# Altium PCB main.PcbDoc
Units mm, origin at the board's own origin, x right, y up, seen from the top; angles counter-clockwise.
Board outline 45 x 75 mm, 4 copper layers (Top copper, Inner copper 1, Inner copper 2, Bottom copper), stack 1.618 mm thick; 12 components, 0 nets, 58 pads, 0 vias.
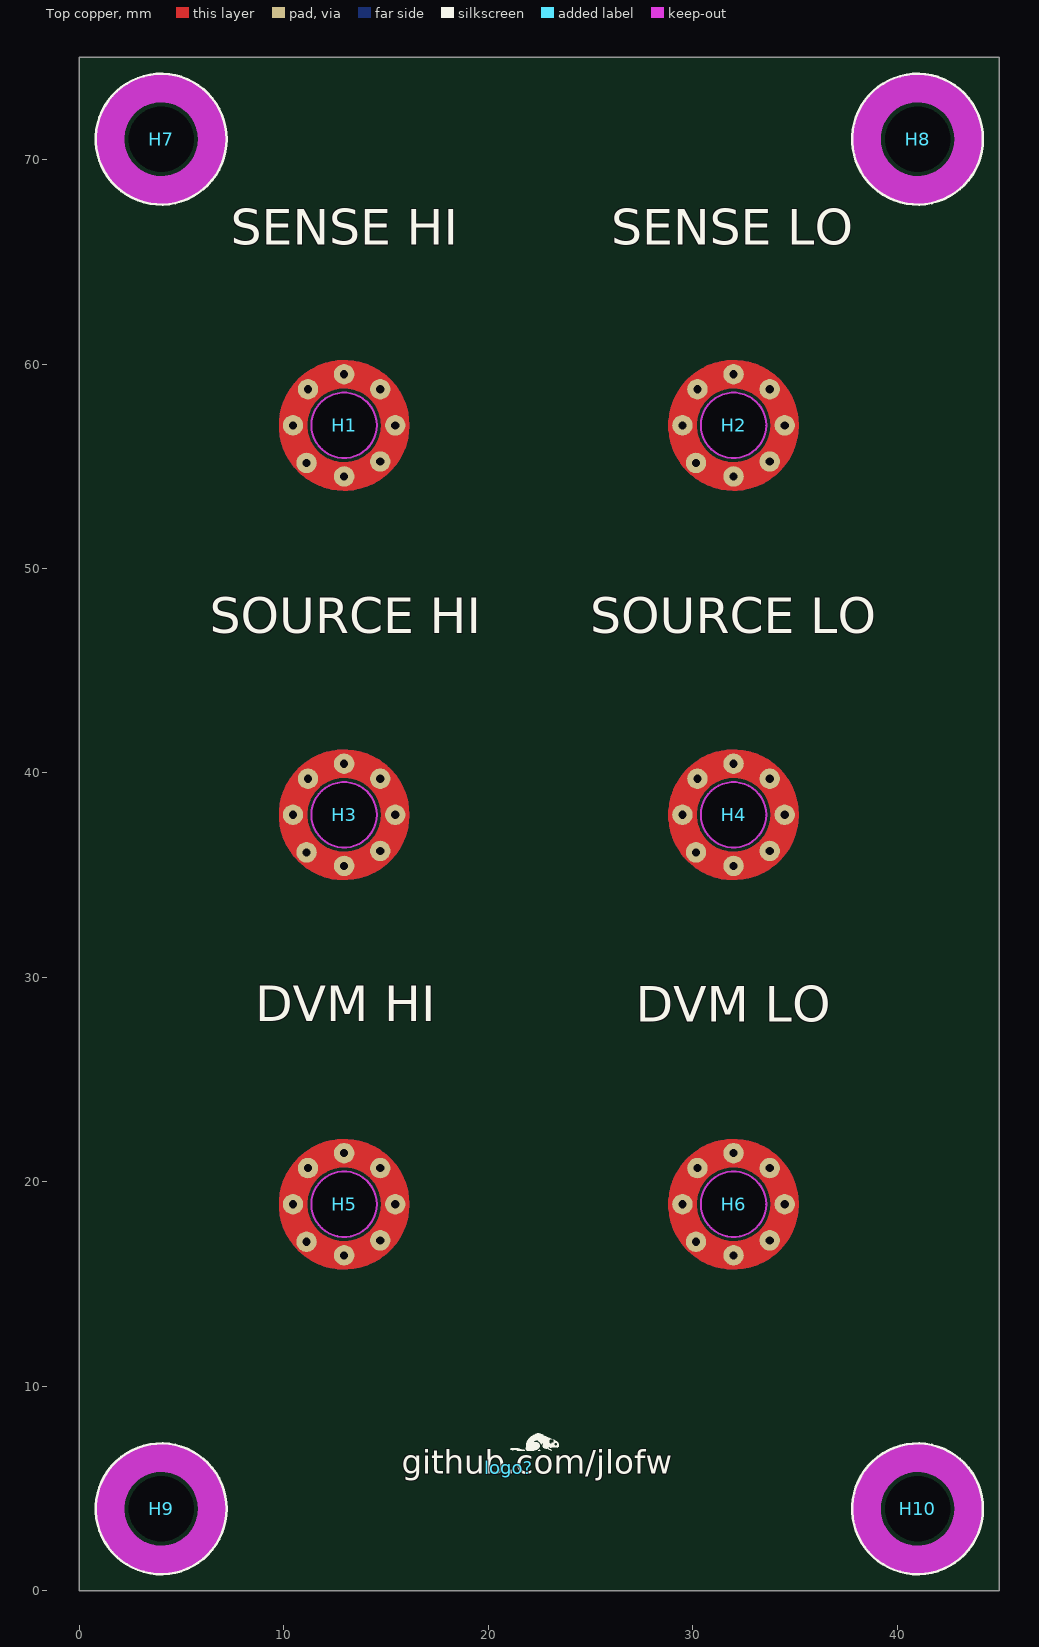
[diagram p0: Top copper view]
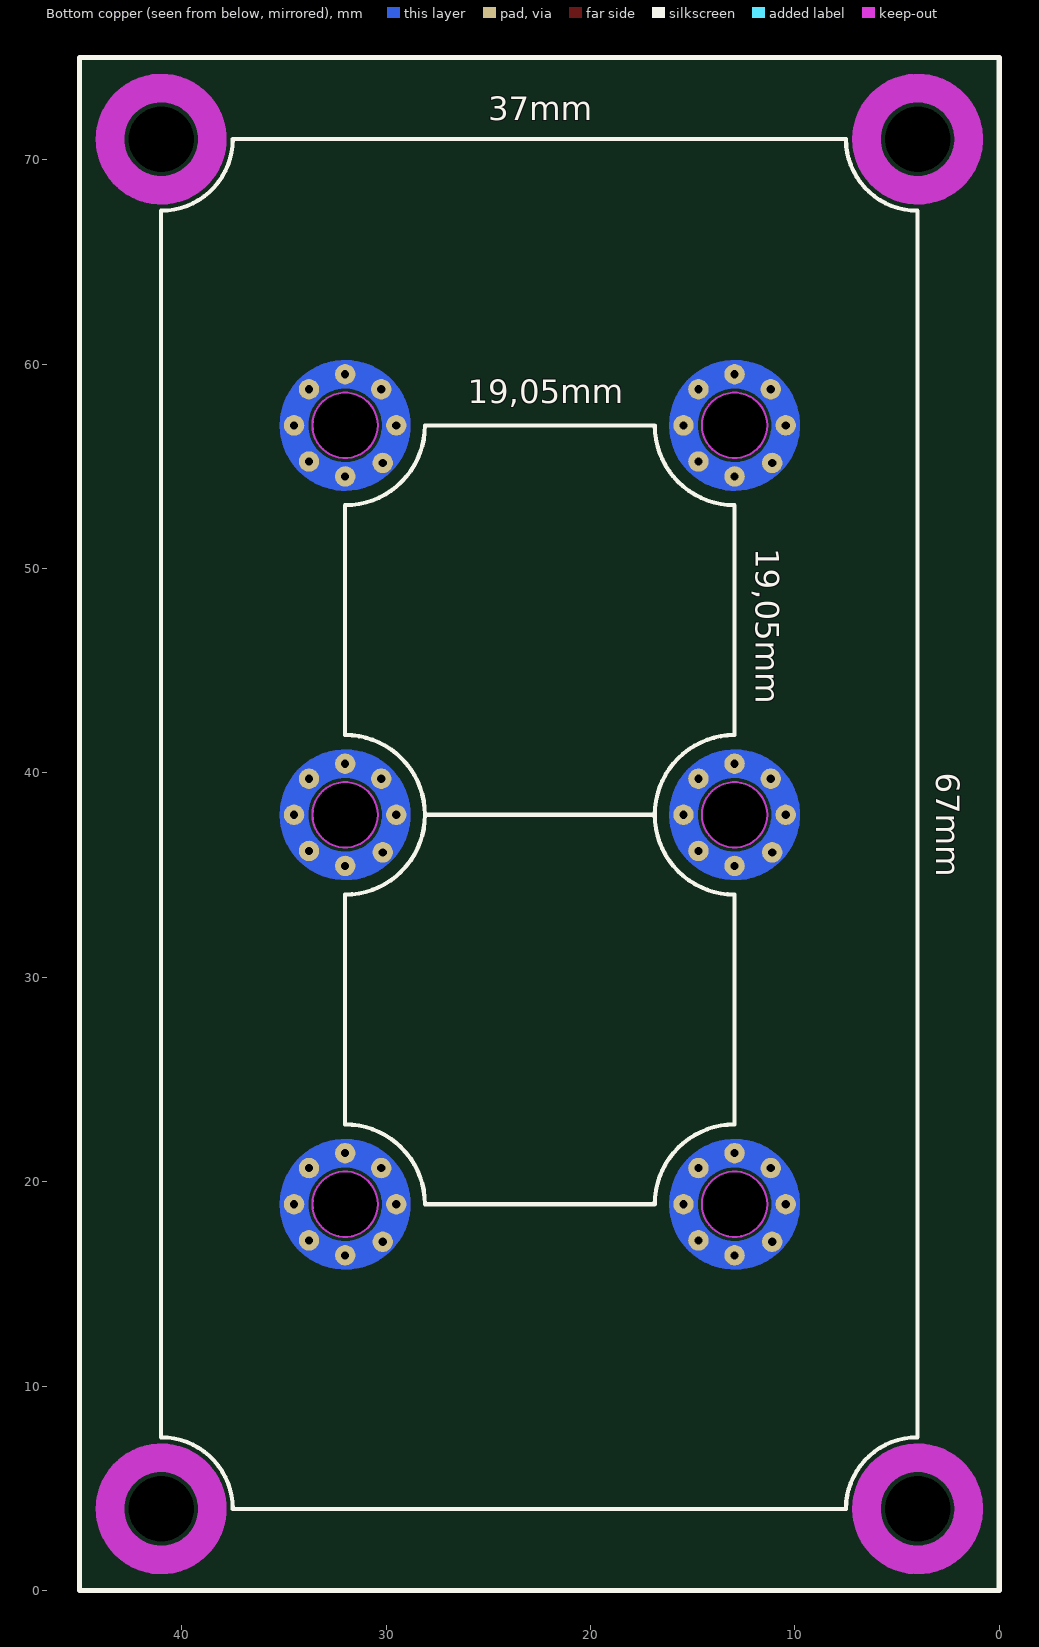
[diagram p1: Bottom copper view, seen from below]

## Layer stack, top to bottom
Top Solder: solder mask 0.0102, Solder Resist, Dk 3.5
Top copper: signal copper 0.018
Dielectric 4: prepreg 0.078, PP-006, Dk 3.9
Dielectric 2: prepreg 0.078, PP-006, Dk 3.9
Inner copper 1: signal copper 0.035
Dielectric 1: dielectric 1.2, FR-4, Dk 4.4
Inner copper 2: signal copper 0.035
Dielectric 3: prepreg 0.078, PP-006, Dk 3.9
Dielectric 5: prepreg 0.078, PP-006, Dk 3.9
Bottom copper: signal copper 0.018
Bottom Solder: solder mask 0.0102, Solder Resist, Dk 3.5

## Board outline
0,0 0,75 45,75 45,0

## Design rules (kind name [scope] priority, off if disabled: settings)
BoardOutlineClearance [All] p1: gap=0.254 ignorepadtopadclearanceinfootprint=FALSE except(0: Arc-SplitContinuation Track-SplitContinuation SMDPad-SplitContinuation THPad-SplitContinuation Via-SplitContinuation Fill-SplitContinuation Poly-SplitContinuation Region-SplitContinuation Text-SplitContinuation)
Clearance [All] p1: gap=0.2 ignorepadtopadclearanceinfootprint=TRUE except(0.1: Arc-Arc)
DiffPairsRouting [All] p1: maxlimit=0.254 minlimit=0.254 mostfreqgap=0.254 toplayer_minwidth=0.2 toplayer_maxwidth=0.381 toplayer_prefwidth=0.381 midlayer1_minwidth=0.2 midlayer1_maxwidth=0.381 midlayer1_prefwidth=0.381 midlayer2_minwidth=0.2 midlayer2_maxwidth=0.381 midlayer2_prefwidth=0.381 bottomlayer_minwidth=0.2 bottomlayer_maxwidth=0.381 bottomlayer_prefwidth=0.381 maxuncoupledlength=12.7
Height [All] p1: minheight=0 maxheight=1000 prefheight=12.7
HoleSize [All] p1: absolutevalues=TRUE maxlimit=4 minlimit=0.2 maxpercent=80.000 minpercent=20.000
NetsToIgnore [InNet('GND')] p1:
PolygonConnect PowerPolygonConnect [InNetClass('PowerNet')] p1: connectstyle=Direct reliefconductorwidth=0.254 reliefentries=4 polygonreliefangle="90 Angle" airgapwidth=0.254
PolygonConnect [All] p2: connectstyle=Relief reliefconductorwidth=0.254 reliefentries=4 polygonreliefangle="90 Angle" airgapwidth=0.254
RoutingVias [All] p1: holewidth=0.2 width=0.6 viastyle="Through Hole" minholewidth=0.2 minwidth=0.6 maxholewidth=3 maxwidth=3.6 useviatemplates=TRUE viatemplateguid#1={8A2419F9-FE0F-4950-AD33-AFA5706682D3} viatemplatename#1=v60h20
SolderMaskExpansion [All] p1: expansion=0.102 istentingtop=FALSE
UnRoutedNet [All] p1: checkbadconnections=TRUE
Width [All] p1: maxlimit=1.16 minlimit=0.254 preferedwidth=0.58
26 further rules are at their usual default settings.

## Components (designator, comment, footprint, x,y, rotation, side; value= is the part's Value field where it differs from the comment)
H1 "M3 binding post" deltron_552 12.95,57 r0 top
H2 "M3 binding post" deltron_552 32,57 r0 top
H3 "M3 binding post" deltron_552 12.95,37.95 r0 top
H4 "M3 binding post" deltron_552 32,37.95 r0 top
H5 "M3 binding post" deltron_552 12.95,18.9 r0 top
H6 "M3 binding post" deltron_552 32,18.9 r0 top
H7 "Unplated M3" MountingHole_3.2mm_M3_NPTH 4,71 r0 top
H8 "Unplated M3" MountingHole_3.2mm_M3_NPTH 41,71 r0 top
H9 "Unplated M3" MountingHole_3.2mm_M3_NPTH 4,4 r0 top
H10 "Unplated M3" MountingHole_3.2mm_M3_NPTH 41,4 r0 top
logo1 "beaver" beaver 151,-6 r90 top
logo? "beaver" beaver 21,6 r0 top

## Footprints (in the part's own frame and the unit in brackets; to place one, negate y for a bottom-side part, rotate by r counter-clockwise, add the part's x,y. Pads: shape width x height; smd on the part's side, far side on the other; paste and mask are expansions set on the pad)
beaver [mm]
  silkscreen extent 0.08,0.85 2.46,1.69
deltron_552 [mm] "M3 binding post"
  round 1 hole 0.4: 1(-2.5,0) 1(-1.838,-1.838) 1(-1.768,1.768) 1(0,-2.5) 1(0,2.5) 1(1.768,-1.768) 1(1.768,1.768) 1(2.5,0)
  round 3.2 hole 3.2 unplated mask+1.6: ""(0,0)
  Keep-Out Layer circle w0.1: c0,0 r1.6
  Multi-Layer lines w1.4: 2.5,0 ccw(c0,0) 2.5,0
  body extent -6.93,-6.89 6.93,10.8, height 29.77
MountingHole_3.2mm_M3_NPTH [mm] "Unplated M3 mounting hole without pad"
  round 0 hole 3.2 unplated mask+0: 1(0,0)
  Keep-Out Layer circle w1.4: c0,0 r2.5
  silkscreen extent -3.2,-3.2 3.2,3.2

## Part data
H1 H2 H3 H4 H5 H6: library part 110007, Manufacturer=Deltron, Manufacturer P/N=552, Internal Number=110007
H7 H8 H9 H10: library part 3, Internal Number=3
logo1 logo?: library part 4, Internal Number=4

## Nets (pads, with @x,y where several pads share a name; then routed paths per layer and width w, separated by ;. In a path a pad name is that pad's centre, name@x,y a point inside that pad or via, vN(x,y) a via of type N, cw(c..) or ccw(c..) an arc to the next point about the centre after c; other vN are vias at no path point)
pads on no net: H1. H1.1 H2. H2.1 H3. H3.1 H4. H4.1 H5. H5.1 H6. H6.1 H7.1 H8.1 H9.1 H10.1

## Silkscreen, mask and mechanical layers (free items; w line width, h text height)
Top Overlay:
  text "SENSE HI" at 7.393,65.237 h3
  text "SENSE LO" at 26.011,65.237 h3
  text "SOURCE HI" at 6.367,46.237 h3
  text "SOURCE LO" at 24.985,46.237 h3
  text "DVM HI" at 8.591,27.273 h3
  text "DVM LO" at 27.209,27.237 h3
  text "github.com/jlofw" at 15.766,5.325 h2
Bottom Overlay:
  the board outline again, w0.254
  text "37mm" at 25,71.525 h2
  text "19,05mm" at 25.999,57.683 h2
  text "19,05mm" at 12.317,50.999 h2 r90
  text "67mm" at 3.475,40 h2 r90